# EAGLE board PhotoAccoppiatore (EAGLE 9.5.2)

Size 100.33 x 70 mm. Coordinates in mm from the lower left corner, seen from the top.
Outline: 0,69.85 0,0 100.33,0 100.33,69.85
Outline: 0,69.85 0,70
Outline: 0,69.85 100,69.85
Copper layers (1*16): Top 0.035mm / dielectric 1.5mm / Bottom 0.035mm
Design rules "default": minimum track width 10mil, minimum drill 24mil, track to track 8mil, track to pad 8mil, pad to pad 8mil, via to via 8mil, smd to smd 8mil, copper to edge 40mil, drill to drill 8mil, minimum pad ring 10mil, minimum via ring 8mil, stop-mask expansion 4mil, vias tented up to drill 0mil, thermal gap 10mil

## Footprints (pad centres in the part's own frame; a part is rotated, then mirrored left to right if it is on the bottom)
0204/7 = drill 0.813 octagon: 1 -3.81,0; 2 3.81,0
DIL06 = drill 0.813 long: 1 -2.54,-3.81; 2 0,-3.81; 3 2.54,-3.81; 4 2.54,3.81; 5 0,3.81; 6 -2.54,3.81
P1-13Y = drill 1.321 pad 1.905 long: TP 0,0
P1-17Y = drill 1.702 pad 2.121 long: TP 0,0
DIL14 = drill 0.813 long: 1 -7.62,-3.81; 2 -5.08,-3.81; 3 -2.54,-3.81; 4 0,-3.81; 5 2.54,-3.81; 6 5.08,-3.81; 7 7.62,-3.81; 8 7.62,3.81; 9 5.08,3.81; 10 2.54,3.81; 11 0,3.81; 12 -2.54,3.81; 13 -5.08,3.81; 14 -7.62,3.81
TO92- = drill 0.813 long: 1 2.54,0; 2 0,0; 3 -2.54,0
1X01/90 = drill 1.016 long: 1 -1.27,-3.81
E5-8,5 = drill 1.016 pad 2.54: + -2.54,0 | drill 1.016 pad 2.54 octagon: - 2.54,0
MA04-1 = drill 1.016 long: 1 -3.81,0; 2 -1.27,0; 3 1.27,0; 4 3.81,0
MA06-1 = drill 1.016 long: 1 -6.35,0; 2 -3.81,0; 3 -1.27,0; 4 1.27,0; 5 3.81,0; 6 6.35,0
W237-132 = drill 1.194 long: 1 -2.54,-0.635; 2 2.54,-0.635
RS-2,5 = drill 0.813 pad 1.6 octagon: 1 -1.27,0; 2 1.27,0
2X02/90 = drill 1.016 octagon: 1 -1.27,-6.35; 2 -1.27,-3.81; 3 1.27,-6.35; 4 1.27,-3.81

## Placement (x,y rotation side)
E$1  220  [0204/7]  12.06,48.9 90 top
E$2  220  [0204/7]  15.88,67.31 0 top
E$3  Til113  [DIL06]  12.06,59.69 0 top
E$4  [P1-13Y]  30.48,60.96 180 top
E$5  [P1-17Y]  4.45,55.88 90 top
E$6  [P1-17Y]  4.45,48.26 90 top
E$7  [P1-17Y]  38.1,66.67 90 top
E$8  [P1-17Y]  38.1,63.5 90 top
E$9  74HC14  [DIL14]  22.86,53.98 270 top
E$10  [P1-17Y]  38.1,60.33 90 top
E$11  [P1-13Y]  33.02,60.96 180 top
E$17  [0204/7]  113.03,25.4 90 top  (outside the outline)
E$18  [TO92-]  104.14,55.88 90 top  (outside the outline)
E$22  [1X01/90]  112.39,40.01 180 top  (outside the outline)
E$23  [E5-8,5]  106.05,25.4 270 top  (outside the outline)
E$26  [MA04-1]  102.87,15.24 90 top
E$28  [MA06-1]  103.93,39.79 90 top  (outside the outline)
E$29  [W237-132]  105.73,66.04 180 top
E$30  [RS-2,5]  113.03,50.8 90 top  (outside the outline)
E$31  [2X02/90]  108.78,51.77 180 top  (outside the outline)
E$35  [MA04-1]  114.3,13.34 90 top  (outside the outline)
E$44  [P1-17Y]  107.95,39.37 0 top  (outside the outline)

## Library data of the parts
E$1 E$2 E$17 = eagle-ltspice
E$3 = ic-package
E$4-E$8 E$10 E$11 E$44 = testpad
E$9 = 74xx-us
E$18 = transistor-fet
E$22 E$31 = pinhead
E$23 = ref-packages-longpad
E$26 E$28 E$35 = con-lstb
E$29 = con-wago-508
E$30 = discrete

## Nets
S$2: E$3.1 E$5.TP
S$3: E$1.2 E$3.2
S$4: E$1.1 E$6.TP
S$5: E$2.2 E$7.TP E$9.14
S$7: E$2.1 E$3.5 E$9.1
S$8: E$3.4 E$8.TP E$9.7
S$9: E$4.TP E$9.2
S$10: E$10.TP E$11.TP

## Tracks (layer width: path | path; a pad name or v marks a point on that pad's centre or on a via)
S$2  (1 unrouted)
S$3  (1 unrouted)
S$4  (1 unrouted)
S$5  (2 unrouted)
S$7  (2 unrouted)
S$8  (2 unrouted)
S$9  (1 unrouted)
S$10  (1 unrouted)

## Text on the board
bPlace: Vcc | Gnd | Rx | Tx | AVR RECEIVER | AVR TRASMITTER | Gnd